# Altium PCB PCB1.PcbDoc
Units mm, origin at the board's own origin, x right, y up, seen from the top; angles counter-clockwise.
Board outline 65.02 x 29.97 mm, 2 copper layers (Top Layer, Bottom Layer); 37 components, 27 nets, 109 pads, 23 vias.
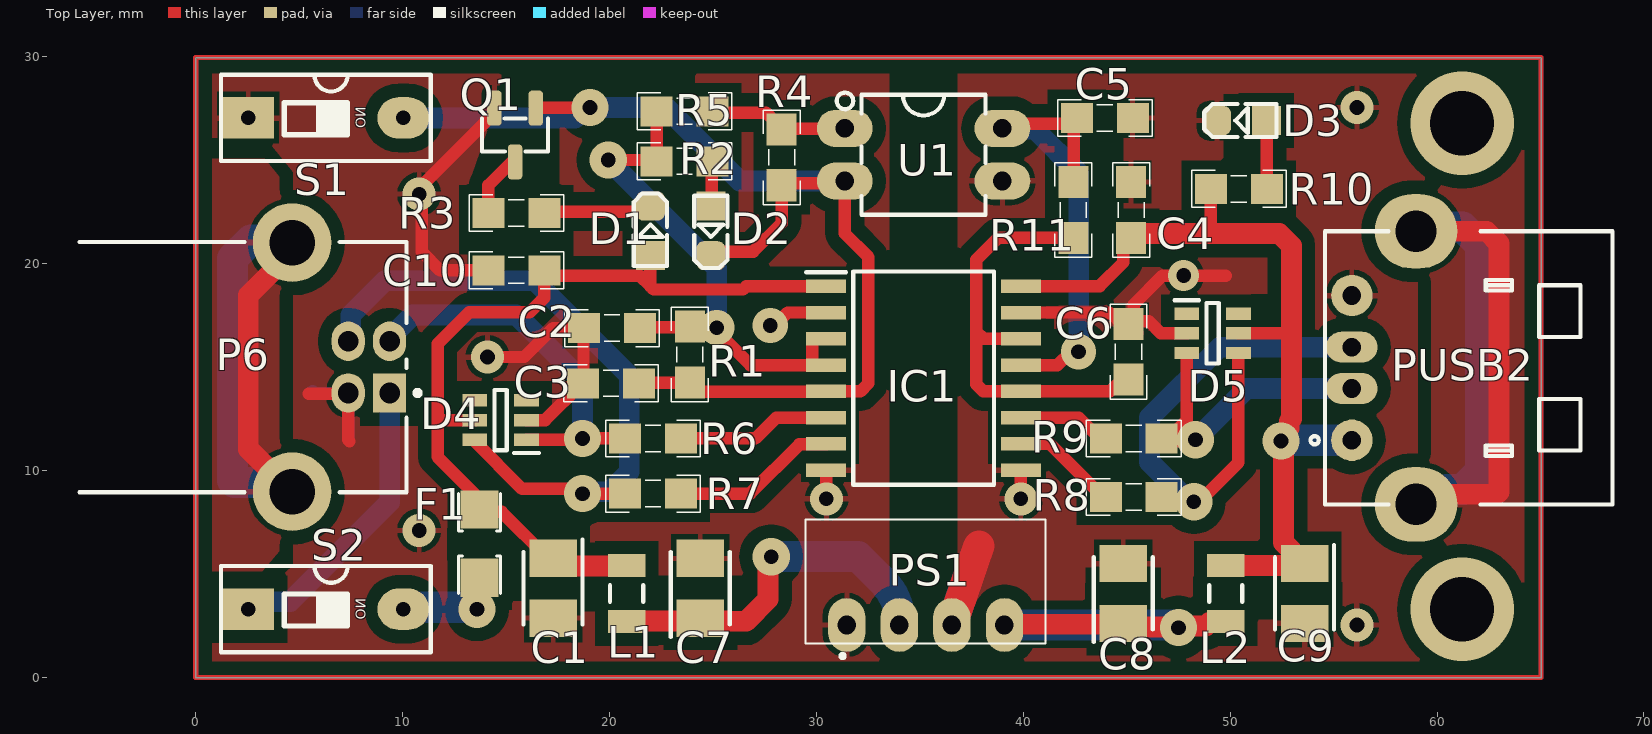
[diagram p0: Top Layer view]
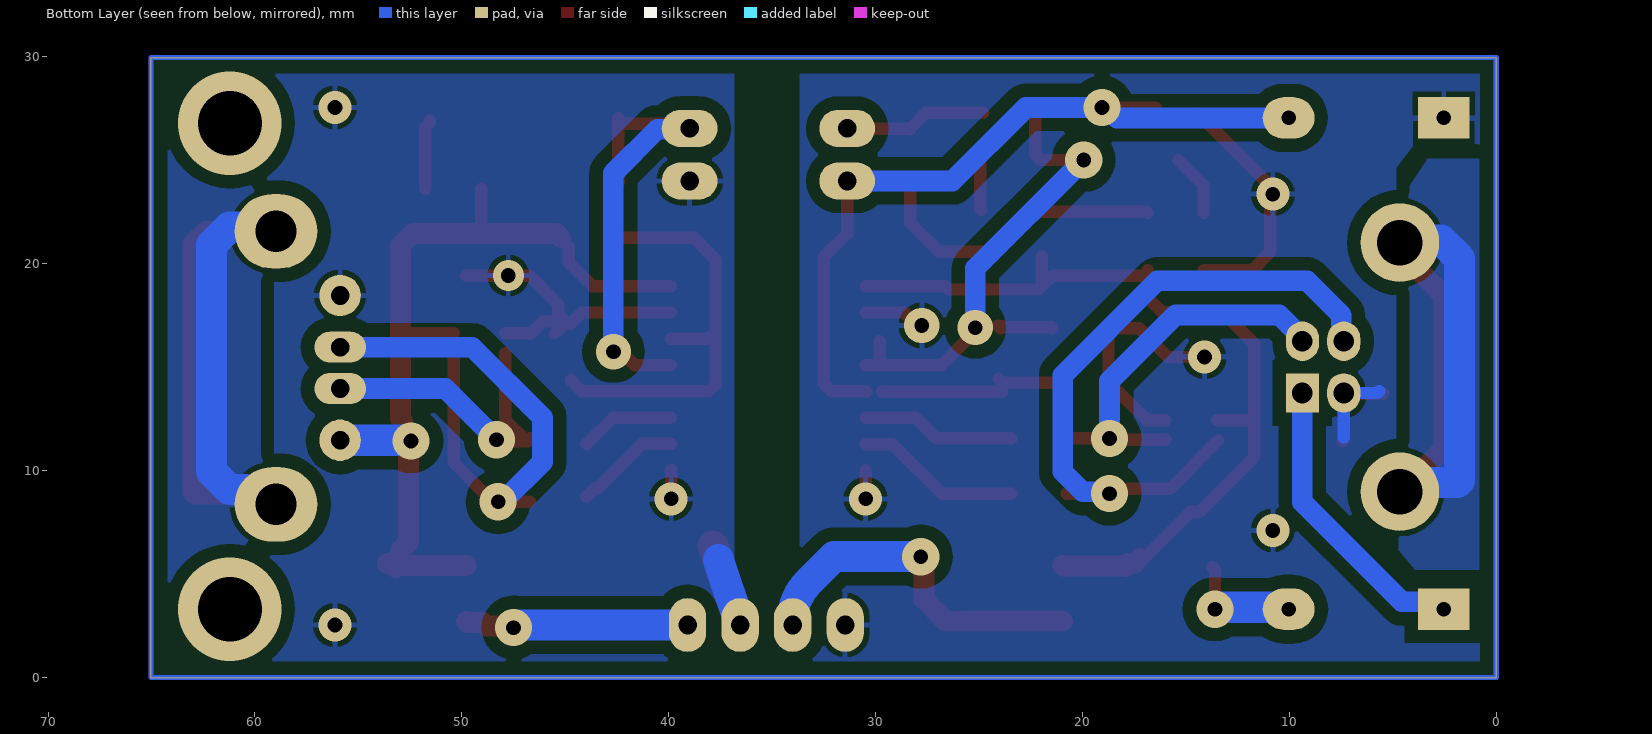
[diagram p1: Bottom Layer view, seen from below]
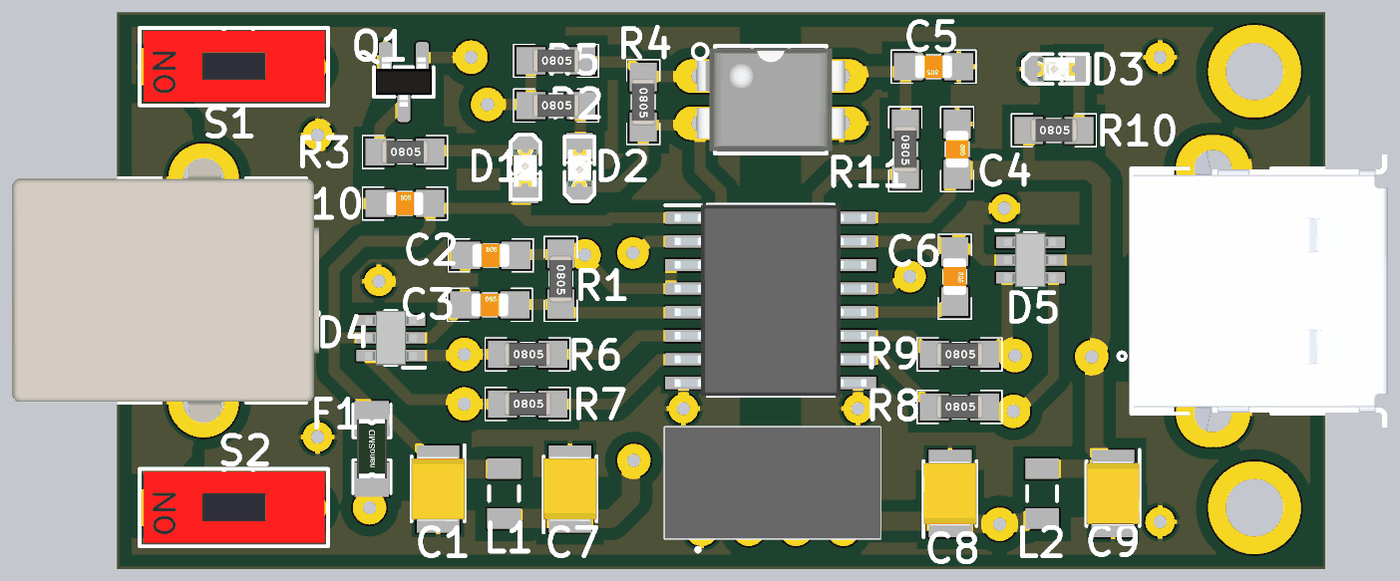
[diagram p2: 3D render of the assembled board from above, using the file's embedded part models]

## Layer stack, top to bottom
Top Solder: solder mask 0.0102, Solder Resist, Dk 3.5
Top Layer: signal copper 0.0356
Dielectric 1: dielectric 0.32, FR-4, Dk 4.8
Bottom Layer: signal copper 0.0356
Bottom Solder: solder mask 0.0102, Solder Resist, Dk 3.5

## Board outline
0,0 0,29.972 65.024,29.972 65.024,0

## Design rules (kind name [scope] priority, off if disabled: settings)
Clearance 0.66 [InNamedPolygon('GND1top') Or InNamedPolygon('GND2top') Or InNamedPolygon('SHI1top') Or InNamedPolygon('SHI2top')] p1: gap=0.65 ignorepadtopadclearanceinfootprint=FALSE except(0: Arc-Hole Track-Hole SMDPad-Hole THPad-Hole Via-Hole Fill-Hole Poly-Hole Region-Hole Text-Hole)
Clearance "Top poly clearance sid" [InNamedPolygon('GND1top') Or InNamedPolygon('GND2top') Or InNamedPolygon('SHI1top') Or InNamedPolygon('SHI2top')] p2: gap=0.7 ignorepadtopadclearanceinfootprint=FALSE except(0: Arc-Hole Track-Hole SMDPad-Hole THPad-Hole Via-Hole Fill-Hole Poly-Hole Region-Hole Text-Hole)
Clearance "bottom clearance sid" [InNamedPolygon('GND1') Or InNamedPolygon('GND2') Or InNamedPolygon('SHI1') Or InNamedPolygon('SHI2')] p3: gap=0.65 ignorepadtopadclearanceinfootprint=FALSE except(0: Arc-Hole Track-Hole SMDPad-Hole THPad-Hole Via-Hole Fill-Hole Poly-Hole Region-Hole Text-Hole)
Clearance Clearance_3 [InNamedPolygon('SHI2top')] p4: gap=0.65 ignorepadtopadclearanceinfootprint=FALSE except(0: Arc-Hole Track-Hole SMDPad-Hole THPad-Hole Via-Hole Fill-Hole Poly-Hole Region-Hole Text-Hole)
Clearance Clearance_2 [InNamedPolygon('GND2TOP')] p5: gap=0.65 ignorepadtopadclearanceinfootprint=FALSE except(0: Arc-Hole Track-Hole SMDPad-Hole THPad-Hole Via-Hole Fill-Hole Poly-Hole Region-Hole Text-Hole)
Clearance Clearance_1 [InNamedPolygon('GND1top') Or InNamedPolygon('GND1top')] p6: gap=0.65 ignorepadtopadclearanceinfootprint=FALSE except(0: Arc-Hole Track-Hole SMDPad-Hole THPad-Hole Via-Hole Fill-Hole Poly-Hole Region-Hole Text-Hole)
Clearance [All] p7: gap=0.254 ignorepadtopadclearanceinfootprint=FALSE except(0: Arc-Hole Track-Hole SMDPad-Hole THPad-Hole Via-Hole Fill-Hole Poly-Hole Region-Hole Text-Hole)
PolygonConnect [All] p1: connectstyle=Relief reliefconductorwidth=0.254 reliefentries=4 polygonreliefangle="90 Angle" airgapwidth=0.254
RoutingVias [All] p1: holewidth=0.711 width=1.27 viastyle="Through Hole" minholewidth=0.711 minwidth=1.27 maxholewidth=0.711 maxwidth=1.27
SolderMaskExpansion [All] p1: expansion=0.102 istentingtop=FALSE
Width [All] p1: maxlimit=1.5 minlimit=0.6 preferedwidth=1
30 further rules are at their usual default settings.

## Components (designator, comment, footprint, x,y, rotation, side; value= is the part's Value field where it differs from the comment)
C1 "TAJB106K016RNJ" CAPPM3528X210N 17.272,4.318 r270 top
C2 "0.1uF" CAPC3413X12N 20.113,16.891 r0 top
C3 "0.1uF" CAPC3413X12N 20.066,14.224 r0 top
C4 "0.1uF" CAPC3413X12N 45.212,22.606 r270 top
C5 "0.1uF" CAPC3413X12N 43.942,27.051 r180 top
C6 "0.1uF" CAPC3413X12N 45.085,15.748 r270 top
C7 "TAJB106K016RNJ" CAPPM3528X210N 24.384,4.318 r90 top
C8 "TAJB106K016RNJ" CAPPM3528X210N 44.831,4.064 r90 top
C9 "TAJB106K016RNJ" CAPPM3528X210N 53.594,4.064 r270 top
C10 "0.1uF" CAPC3413X12N 15.494,19.685 r0 top
D1 "LED805BLU" LED0805BLU 21.971,21.59 r90 top
D2 "LED805RED" LED0805RED 24.892,21.59 r270 top
D3 "LED805RED" LED0805RED 50.546,26.924 r180 top
D4 "CDSOT23-SRV05-4" SOT95P280X145-6N 14.732,12.446 r180 top
D5 "CDSOT23-SRV05-4" SOT95P280X145-6N 49.149,16.637 r0 top
F1 "F=1.0 A" "1206 FUSE" 13.716,6.477 r90 top
IC1 "ADUM3160BRWZ" SOIC127P1032X265-16N 35.179,14.469 r0 top
L1 "Inductor" INDC3216 20.828,4.064 r270 top value=10mH
L2 "Inductor" INDC3216 49.784,4.064 r90 top value=10mH
P6 "USB Connector" USB2.5-2H4F 9.366,13.756 r180 top
PS1 "B0505S-1W" B0505S1W 31.464,2.54 r0 top
PUSB2 "CONN_USB_A" USB_A_REC_RA_THD 55.88,14.97 r270 top
Q1 "MMUN2234LT1G" SOT23_3 15.43,26.226 r270 top
R1 "1K" RESC3413X04N 23.876,15.621 r270 top
R2 "1K" RESC3413X04N 23.622,24.956 r0 top
R3 "1K" RESC3413X04N 15.494,22.454 r0 top
R4 "10K" RESC3413X04N 28.321,25.146 r270 top
R5 "330R" RESC3413X04N 23.622,27.368 r0 top
R6 "24R" RESC3413X04N 22.098,11.557 r0 top
R7 "24R" RESC3413X04N 22.098,8.89 r0 top
R8 "24R" RESC3413X04N 45.339,8.732 r0 top
R9 "24R" RESC3413X04N 45.339,11.557 r0 top
R10 "1K" RESC3413X04N 50.419,23.622 r0 top
R11 "1K" RESC3413X04N 42.418,22.606 r270 top
S1 "DS1" "DIP Switch x1" 2.533,27.051 r270 top
S2 "DS1" "DIP Switch x1" 2.533,3.302 r270 top
U1 "EL817" DIP_4 35.179,25.273 r0 top

## Footprints (in the part's own frame and the unit in brackets; to place one, negate y for a bottom-side part, rotate by r counter-clockwise, add the part's x,y. Pads: shape width x height; smd on the part's side, far side on the other; paste and mask are expansions set on the pad)
"1206 FUSE" [mm] "Fast Acting Smd 1206 non-Resettable Fuse Chip For Pcb Board-Design:Abbas Basereh"
  rect 1.85x1.85 smd: 1(-1.65,0) 2(1.65,0)
  silkscreen extent -2.41,-1.02 2.41,1.02, body extent -1.6,-0.8 1.6,0.8, height 1
B0505S1W [mm]
  oval 1.8x2.6 hole 0.9: 1(0,0) 2(2.54,0) 3(5.08,0) 4(7.62,0)
  silkscreen extent -1.99,-1.6 9.61,5.1, body extent -1.99,-0.9 9.61,5.1, height 10.51
CAPC3413X12N [mm] "Chip Capacitor, 2-Leads, Body 3/40x1/30mm, IPC Medium Density-Design:Abbas Basereh"
  rect 1.55x1.45 smd: 1(-1.35,0) 2(1.35,0)
  silkscreen extent -2.29,-0.89 2.29,0.89, body extent -1,-0.62 1,0.63, height 0.78
CAPPM3528X210N [mm]
  rect 1.8x2.3 smd: 1(-1.45,0) 2(1.45,0)
  silkscreen extent -2.35,-1.43 1.75,1.43, body extent -1.75,-1.43 1.75,1.43, height 2.1
"DIP Switch x1" [mm] "Switch DIP 1 way flat slide Thru-Hole-Design:Ali Hafizi"
  rect 2x2.5 hole 0.7: 1(0,0)
  oval 2x2.5 hole 0.7: 2(0,7.5)
  silkscreen extent -2.09,-1.32 2.08,8.82, body extent -1.94,-1.11 1.89,8.64, height 7.33
DIP_4 [mm] "BRIDGE DIODE, DIP, pitch 2.54mm, 300mil Width"
  oval 2.7x1.8 hole 0.9: 1(-3.81,1.27) 2(-3.81,-1.27) 3(3.81,-1.27) 4(3.81,1.27)
  silkscreen extent -4.2,-2.9 3,3, body extent -4,-2.77 4,2.77, height 4.31
INDC3216 [mm] "Chip Inductor, Body 3.2x1.6mm, IPC High Density"
  rect 1.1x1.8 smd: 1(-1.35,0) 2(1.35,0)
  silkscreen extent -0.4,-0.8 0.4,0.8, body extent -1.7,-0.9 1.7,0.9, height 0.55
LED0805BLU [mm] "LED SMD 0805, BLUE"
  rect 1.4x1.4 smd mask+0.075: 1(-1.2,0)
  rrect50% 1.4x1.4 smd mask+0.075: 2(1.2,0)
  Top Layer pour cut-out: -0.5,0.8 0.5,0.8 0.5,-0.8 -0.5,-0.8
  silkscreen extent -1.7,-0.8 1.8,0.8, body extent -1,-0.63 1,0.63, height 0.7
LED0805RED [mm] "LED SMD 0805, RED"
  rect 1.4x1.4 smd mask+0.075: 1(-1.2,0)
  rrect50% 1.4x1.4 smd mask+0.075: 2(1.2,0)
  Top Layer pour cut-out: -0.5,0.8 0.5,0.8 0.5,-0.8 -0.5,-0.8
  silkscreen extent -1.7,-0.8 1.8,0.8, body extent -1,-0.63 1,0.63, height 0.7
RESC3413X04N [mm] "Chip Resistor, 2-Leads, Body 3/40x1/30mm, IPC Medium Density-Design:Abbas Basereh"
  rect 1.55x1.45 smd: 1(-1.35,0) 2(1.35,0)
  silkscreen extent -2.29,-0.89 2.29,0.89, body extent -1.25,-0.62 1.25,0.62, height 0.79
SOIC127P1032X265-16N [mm]
  rect 1.925x0.65 smd: 1(-4.712,4.445) 2(-4.712,3.175) 3(-4.712,1.905) 4(-4.712,0.635) 5(-4.712,-0.635) 6(-4.712,-1.905) 7(-4.712,-3.175) 8(-4.712,-4.445) 9(4.712,-4.445) 10(4.712,-3.175) 11(4.712,-1.905) 12(4.712,-0.635) 13(4.712,0.635) 14(4.712,1.905) 15(4.712,3.175) 16(4.712,4.445)
  silkscreen extent -5.68,-5.15 3.4,5.15, body extent -5.16,-5.15 5.16,5.15, height 2.65
SOT23_3 [mm] "SOT-23, Micro3, MO-178, TO-236AB, MO-193C, SuperSOT3, SC-59, 1.9mm pitch 3X1.5mm body"
  rrect50% 1.7x0.7 smd: 1(-1.3,1) 2(-1.3,-1) 3(1.3,0)
  silkscreen extent -0.8,-1.6 0.8,1.6, body extent -1.32,-1.5 1.32,1.5, height 1.08
SOT95P280X145-6N [mm]
  rect 1.2x0.6 smd: 1(-1.25,0.95) 2(-1.25,0) 3(-1.25,-0.95) 4(1.25,-0.95) 5(1.25,0) 6(1.25,0.95)
  silkscreen extent -1.85,-1.46 0.3,1.6, body extent -1.4,-1.46 1.4,1.46, height 0.78
USB2.5-2H4F [mm] "Connector; USB1.1, Type B, Thru-Hole; 4 Position; Right Angle"
  rect 1.6x1.9 hole 1: 1(0,0)
  oval 1.6x1.9 hole 1: 2(0,-2.5) 3(2,-2.5) 4(2,0)
  round 3.8 hole 2.2: 5(4.71,-7.27) 6(4.71,4.77)
  silkscreen extent -1.48,-7.3 14.99,4.8, body extent -1.5,-8.7 15,6.2, height 10.95
USB_A_REC_RA_THD [mm] "CONN, USB A, Receptacle, RIGHT ANGLE, THD"
  round 2 hole 0.9: 1(3.5,0) 4(-3.5,0)
  oval 1.5x2.5 hole 0.9: 2(1,0) 3(-1,0)
  oval 3.6x4 hole 2: SH1(-6.6,3.1) SH2(6.6,3.1)
  silkscreen extent -6.6,-2 6.6,12.6, body extent -7.9,-1.2 7.9,12.5, height 6.95

## Part data
C1 C7 C8 C9: "Capacitor Polarised", Manufacturer_Name=AVX, Mouser Part Number=581-TAJB106K016, Arrow Part Number=TAJB106K016RNJ, Arrow Price/Stock=https://www.arrow.com/en/products/tajb106k016rnj/avx, Datasheet Link=http://datasheets.avx.com/TAJ.pdf, Height=2.1mm, Manufacturer_Part_Number=TAJB106K016RNJ, Mouser Price/Stock=https://www.mouser.co.uk/ProductDetail/AVX/TAJB106K016RNJ?qs=wgedUHV26DXzpWCLxWDqDw%3D%3D
C2 C3 C4 C5 C6 C10: library part "CAP SMD 0805", "CAP 0805", Data=16-12-2016, Desc.="CAP SMD 0805", Designer="Abbas Basereh"
D1: library part LED_SMD_0805_BLU, "LED, SMD, 0805, BLUE", ASSEMBLY=ASSEMBLY, DESC=DESCRIPTION, MANF=MANF, MANF_P#=MANF_PART#, PARAM2=2.2V, PRICE=36t@Javan
D2 D3: library part LED_SMD_0805_RED, "LED, SMD, 0805, RED", ASSEMBLY=ASSEMBLY, DESC=DESCRIPTION, MANF=MANF, MANF_P#=MANF_PART#, PARAM2=2.2V, PRICE=36t@Javan
D4 D5: "TVS Diode (Uni-directional)", Manufacturer_Name=Bourns, Mouser Part Number=652-CDSOT23-SRV05-4, Arrow Part Number=CDSOT23-SRV05-4, Arrow Price/Stock=https://www.arrow.com/en/products/cdsot23-srv05-4/bourns, Datasheet Link=https://www.bourns.com/docs/Product-Datasheets/CDSOT23-SRV05-4.pdf, Height=1.45mm, Manufacturer_Part_Number=CDSOT23-SRV05-4, Mouser Price/Stock=https://www.mouser.co.uk/ProductDetail/Bourns/CDSOT23-SRV05-4/?qs=y169g2bsK9oS5rHKLe0eWA%3D%3D
F1: library part "Fuse SMD1206", "SMD Fuses 1206", Data=16-12-2016, Desc.="SMD Fuses 1206", Designer="Abbas Basereh"
IC1: "Integrated Circuit", Manufacturer_Name="Analog Devices", Mouser Part Number=584-ADUM3160BRWZ, Arrow Part Number=ADUM3160BRWZ, Arrow Price/Stock=https://www.arrow.com/en/products/adum3160brwz/analog-devices, Datasheet Link=http://www.analog.com/media/en/technical-documentation/data-sheets/ADuM3160.pdf, Height=2.65mm, Manufacturer_Part_Number=ADUM3160BRWZ, Mouser Price/Stock=https://www.mouser.co.uk/ProductDetail/Analog-Devices/ADUM3160BRWZ/?qs=WIvQP4zGanjmPiCfFUKkZQ%3D%3D
P6: library part "USB B-Type", "USB Connector-B Type", Adding Date=10/26/2010
PS1: "Power Supply", Manufacturer_Name=Mornsun, Datasheet Link=https://www.mornsun-power.com/uploads/pdf/B_D-1W.pdf, Height=10.41mm, Manufacturer_Part_Number=B0505S-1W
PUSB2: library part CONN_USB_A_REC_RA_THD, "CONN, USB, A, RECEPTACLE, R/A, THD"
Q1: "Transistor BJT NPN", Manufacturer_Name="ON Semiconductor", Mouser Part Number=863-MMUN2234LT1G, Arrow Part Number=MMUN2234LT1G, Arrow Price/Stock=https://www.arrow.com/en/products/mmun2234lt1g/on-semiconductor, Datasheet Link=http://www.onsemi.com/pub/Collateral/DTC124X-D.PDF, Height=1.11mm, Manufacturer_Part_Number=MMUN2234LT1G, Mouser Price/Stock=https://www.mouser.com/Search/Refine.aspx?Keyword=863-MMUN2234LT1G
R1 R2 R3 R4 R5 R6 R7 R8 R9 R10 R11: library part "RES 0805 0.125W", "RES 0805", Data=16-12-2016, Desc.="RES SMD 0805", Designer="Abbas Basereh"
S1 S2: library part "DIP Switch 1", "1 BIT DIP Switch"
U1: library part OPTC_TR4P_EL817, "OPTOCOUPLER, TRANSISTOR, 4PIN", PARAM=IF=5mA, PARAM2="VCE = 5V", PRICE=300t@Paya
L1 L2: Code_IEC=1005, Code_JEITA=0402, LatestRevisionDate=29-May-2009, LatestRevisionNote="IPC-7351 Footprint Added.", PackageDescription="Chip Inductor", PackageReference=0402-A, Published=8-Jun-2000, Publisher="Altium Limited"

## Via types
v1: diameter 1.8, hole 0.711, Top Layer to Bottom Layer, 10 vias
v2: diameter 1.6, hole 0.711, Top Layer to Bottom Layer, 7 vias
v3: diameter 1.7, hole 0.711, Top Layer to Bottom Layer, 3 vias
v4: diameter 5, hole 3.1, Top Layer to Bottom Layer, 2 vias
v5: diameter 1.5, hole 0.711, Top Layer to Bottom Layer, 1 vias

## Nets (pads, with @x,y where several pads share a name; then routed paths per layer and width w, separated by ;. In a path a pad name is that pad's centre, name@x,y a point inside that pad or via, vN(x,y) a via of type N, cw(c..) or ccw(c..) an arc to the next point about the centre after c; other vN are vias at no path point)
D1m: D4.1 P6.2 R6.1 | length 18.8
  Top Layer w0.6: D4.1 18.627,11.496 v1(18.688,11.557) R6.1
  Bottom Layer w1: P6.2 9.366,16.406 10.486,17.526 15.494,17.526 18.688,14.332 v1(18.688,11.557)
D1p: D4.6 P6.3 R7.1 | length 33.1
  Top Layer w0.6: D4.6@13.439,11.453 15.772,9.12 18.458,9.12 v1(18.688,8.89) R7.1
  Bottom Layer w1: P6.3 7.481,16.371 7.481,17.514 9.144,19.177 16.383,19.177 20.955,14.605 20.955,9.951 19.988,8.984 18.782,8.984 v1(18.688,8.89)
D2m: D5.3 PUSB2.2 R9.2 | length 15
  Top Layer w0.6: R9.2 46.816,11.43 R9.2@46.866,11.43 ; D5.3 47.899,12.463 R9.2@46.866,11.43 ; v1(48.323,11.493) 48.26,11.43 R9.2@46.866,11.43
  Bottom Layer w1: v1(48.323,11.493) 50.8,13.97 PUSB2.2
D2p: D5.4 PUSB2.3 R8.2 | length 26.1
  Top Layer w0.6: R8.2@46.704,8.494 48.499,8.494 50.399,10.394 D5.4
  Bottom Layer w1: v1(48.245,8.494) 48.028,8.494 46.101,10.421 46.101,12.573 49.498,15.97 PUSB2.3
DDm: IC1.11 R9.1 | length 4.6
  Top Layer w0.6: IC1.11 42.678,12.564 43.939,11.303 R9.1@43.989,11.303
DDp: IC1.10 R8.1 | length 5.2
  Top Layer w0.6: IC1.10 41.284,11.294 43.421,9.157 43.564,9.157 R8.1
GND1: C1.2 C2.1 C3.1 C7.2 C10.1 D4.2 IC1.2 IC1.8 P6.4 PS1.1 Q1.2 S1.1 | length 35.8
  Top Layer w0.6: 5.461,13.716 7.326,13.716 P6.4 7.366,11.493 7.429,11.43 ; v2(14.097,15.494) 15.875,15.494 17.272,16.891 C2.1 18.74,16.867 18.74,14.248 C3.1 ; C10.1 11.811,19.685 10.922,20.574 10.922,23.241 v2(10.795,23.368) 10.986,23.559 10.986,23.831 Q1.2@14.414,27.259 ; D4.2 16.888,12.446 18.589,14.147 C3.1@18.589,14.351 ; v3(27.769,17.018) 27.978,17.018 28.605,17.644 IC1.2 ; IC1.8 30.48,10.011 v2(30.48,8.636)
  Bottom Layer w0.6: 5.651,13.843 5.739,13.756 P6.4 7.366,11.62
  other v2: 10.795,7.112
GND2: C4.1 C5.1 C6.1 C8.2 C9.2 D3.2 D5.2 IC1.9 IC1.15 PS1.3 PUSB2.4 U1.3 | length 23.5
  Top Layer w0.6: v2(39.878,8.636) 39.878,10.011 IC1.9 ; IC1.15 44.158,17.644 44.229,17.573 44.279,17.573 44.754,17.098 C6.1 ; C6.1@45.253,16.93 45.253,16.894 C6.1@45.51,16.637 ; D5.2 46.652,16.637 46.064,17.225 45.176,17.225 45.084,17.318 45.339,17.573 45.339,18.034 46.736,19.431 v5(47.752,19.431) 49.784,19.431
  Top Layer w1.5: PS1.3 37.846,6.35
  Bottom Layer w1.5: PS1.3 37.592,5.715
  other v2: 56.134,2.54 56.134,27.559
NetC7_1: C7.1 L1.2 PS1.2 | length 22.2
  Top Layer w1: 25.654,2.739 20.98,2.739 20.955,2.714 26.59,2.714 27.66,3.784 27.66,5.689 v1(27.813,5.842)
  Bottom Layer w1.5: v1(27.813,5.842) 32.004,5.842 33.26,4.586 cw(c31.464,2.79) 33.947,3.327 cw(c31.464,2.79) 34.004,2.79 PS1.2
NetC8_1: C8.1 L2.1 PS1.4 | length 19.3
  Top Layer w1: PS1.4 39.121,2.577 44.794,2.577 44.932,2.439 47.218,2.439 v1@47.404,2.253 ; v1(47.498,2.413) 47.574,2.489 48.816,2.489 48.991,2.664 49.734,2.664 L2.1
  Bottom Layer w1.5: PS1.4 47.29,2.54 47.417,2.413 v1(47.498,2.413)
NetD1_2: D1.2 R3.2 | length 5.2
  Top Layer w0.6: R3.2 16.912,22.522 21.903,22.522 D1.2@21.971,22.59
NetD2_1: D2.1 R2.2 | length 2.7
  Top Layer w0.6: D2.1@24.892,22.59 24.932,22.63 24.932,25.233 R2.2@24.972,25.273
NetD3_1: D3.1 R10.2 | length 3.4
  Top Layer w0.6: D3.1@51.546,26.924 51.546,26.824 51.769,26.601 R10.2
NetF1_1: F1.1 S2.2 | length 5.7
  Top Layer w0.6: v1(13.589,3.302) 13.589,5.208 F1.1@13.716,5.335
  Bottom Layer w1.5: S2.2 10.129,3.398 13.493,3.398 v1(13.589,3.302)
NetQ1_3: Q1.3 R3.1 | length 3.1
  Top Layer w0.6: R3.1 14.144,23.796 Q1.3@15.352,25.004
NetR4_1: R4.1 R5.2 U1.1 | length 7
  Top Layer w0.6: R5.2@24.799,27.305 27.562,27.305 28.321,26.546 R4.1 28.345,26.519 31.345,26.519 U1.1
shi1: P6.5 P6.6 | length 31
  Top Layer w1: P6.5@4.58,21.026 P6.5 4.656,20.595 2.54,18.479 2.54,11.049 4.603,8.986 P6.6
  Bottom Layer w1.5: P6.6 4.413,8.986 3.972,9.426 1.867,9.426 1.778,9.515 1.778,20.267 2.657,21.145 4.537,21.145 P6.5
shi2: PUSB2.SH1 PUSB2.SH2 | length 36.8
  Top Layer w1: PUSB2.SH2@59.98,8.37 60.477,8.867 62.892,8.867 62.992,8.968 62.992,20.984 62.406,21.57 PUSB2.SH1@59.98,21.57
  Bottom Layer w1.5: PUSB2.SH2 59.748,8.37 60.459,9.08 61.224,9.08 62.103,9.959 62.103,20.902 61.224,21.78 59.19,21.78 PUSB2.SH1
SPD: C5.2 IC1.13 R11.1 U1.4 | length 23
  Top Layer w0.6: U1.4 39.219,26.773 42.187,26.773 42.442,27.027 42.442,23.979 R11.1 ; IC1.13 41.647,15.104 42.291,15.748 v3(42.672,15.748)
  Bottom Layer w1: U1.4 39.024,26.508 40.548,26.508 42.672,24.384 v3(42.672,15.748)
SPU: C3.2 D2.2 IC1.5 Q1.1 R1.2 R4.2 S1.2 U1.2 | length 54.7
  Top Layer w0.6: Q1.1 16.447,27.542 19.033,27.542 v1(19.05,27.559) ; C3.2 21.439,14.248 23.852,14.248 R1.2 R1.2@24.049,14.444 ; R1.2@23.876,13.809 IC1.5@29.68,13.809 ; D2.2@24.892,20.59 26.94,20.59 28.321,21.971 R4.2 28.424,23.9 31.266,23.9 U1.2 31.369,21.463 32.512,20.32 32.512,14.224 32.122,13.834 IC1.5 IC1.5@30.442,13.809
  Bottom Layer w1: S1.2 v1@18.326,27.051 ; v1(19.05,27.559) 22.733,27.559 26.289,24.003 U1.2
UDm: IC1.6 R6.2 | length 7.4
  Top Layer w0.6: R6.2 27.051,11.557 28.058,12.564 IC1.6
UDp: IC1.7 R7.2 | length 8
  Top Layer w0.6: R7.2 26.797,8.89 29.176,11.269 30.442,11.269 IC1.7
VBUS1: P6.1 S2.1 | length 14.3
  Bottom Layer w1: S2.1 2.89,3.659 4.548,3.659 6.167,5.278 9.366,8.477 P6.1
VBUS1F: C1.1 C10.2 D1.1 D4.5 F1.2 IC1.1 L1.1 | length 41.6
  Top Layer w0.6: D4.5 11.811,12.446 11.684,12.573 ; C10.2 C10.2@16.844,19.431 ; C1.1 17.249,5.768 17.022,5.768 14.78,8.01 14.341,8.01 11.684,10.667 11.684,12.573 ; D1.1@21.971,20.34 21.971,18.914 ; IC1.1 26.606,18.914 26.448,18.756 22.129,18.756 21.971,18.914 ; 11.684,12.573 11.684,16.129 13.208,17.653 16.129,17.653 16.844,18.368 C10.2@16.844,19.431 ; C10.2@16.844,19.431 21.454,19.431 21.971,18.914
  Top Layer w1: C1.1@17.249,5.768 17.507,5.51 17.807,5.51 17.907,5.41 17.907,5.364 17.932,5.389 20.93,5.389 L1.1@20.955,5.414
VBUS2: C4.2 C9.1 D5.5 IC1.16 L2.2 PUSB2.1 R10.1 | length 42.5
  Top Layer w0.6: IC1.16 41.647,18.914 41.656,18.923 43.688,18.923 44.83,20.065 C4.2@44.83,20.824 ; 49.069,21.256 R10.1 ; D5.5 52.959,16.637
  Top Layer w1: C4.2 45.419,21.463 52.373,21.463 52.959,20.877 52.959,16.637 52.959,12.504 52.851,12.396 52.851,12.046 52.451,11.646 v1(52.451,11.43) ; L2.2 52.944,5.414 53.113,5.414 53.213,5.314 C9.1@53.213,5.645 ; v1@52.578,11.43 52.578,6.53 52.944,6.164 52.944,5.914 C9.1@53.213,5.645 ; C9.1 53.344,5.514 C9.1@53.213,5.645
  Bottom Layer w1.5: v1@52.451,11.47 PUSB2.1
VDD1: C2.2 IC1.3 IC1.4 R1.1 R2.1 R5.1 | length 25.1
  Top Layer w0.6: v1(19.939,25.019) 22.018,25.019 22.272,25.273 R5.1 ; C2.2 21.503,16.931 23.836,16.931 R1.1 23.956,16.891 R1.1@24.083,17.018 ; v3@24.892,17.018 26.806,15.104 IC1.4@29.83,15.104 ; IC1.3@29.804,16.256 29.804,15.129 IC1.4@29.83,15.104 ; IC1.4 IC1.4@29.83,15.104
  Bottom Layer w1: v1(19.939,25.019) 25.178,19.78 v3(25.178,16.915)
VDD2: C6.2 IC1.12 IC1.14 R11.2 | length 20.9
  Top Layer w0.6: IC1.14 39.882,16.383 38.07,16.383 37.719,16.734 ; R11.2 38.782,21.256 37.719,20.193 37.719,16.734 ; C6.2@44.704,14.398 44.704,14.348 44.19,13.834 IC1.12 38.07,13.834 37.719,14.186 37.719,16.734
pads on no net: D4.3 D4.4 D5.1 D5.6
copper on no net:
  other v4: 61.214,3.302 61.214,26.797

## Polygon pours and split planes (outlines as drawn)
GND2 on Bottom Layer "GND2" (solid, pour order 1): 36.83,0.127 36.83,29.845 64.897,29.845 61.658,26.226 59.055,23.622 59.055,6.664 64.897,0.127
GND1 on Bottom Layer "GND1" (solid, pour order 0): 33.655,30.119 0.124,29.845 0.124,25.781 3.937,25.781 4.826,24.652 4.826,4.318 0.232,4.318 0.232,0.403 33.655,0.403
shi1 on Bottom Layer "SHI1" (solid, pour order 4): 4.699,21.082 4.699,22.987 3.345,24.998 3.345,25.075 0.805,25.075 0.805,5.207 3.906,5.207 4.699,6.141
shi2 on Bottom Layer "SHI2" (solid, pour order 5): 59.055,8.491 61.679,4.593 64.219,1.143 64.219,4.516 64.219,28.531 59.055,22.448
GND1 on Top Layer "GND1top" (solid, pour order 6): 33.528,29.865 0.105,29.865 0.105,26.098 3.36,26.098 4.699,24.428 4.699,5.433 3.238,4.064 0.105,4.064 0.105,0.149 33.528,0.149
GND2 on Top Layer "GND2top" (solid, pour order 7): 36.83,0.127 36.83,29.845 64.897,29.845 61.658,26.226 59.055,23.622 59.055,6.664 64.897,0.127
shi1 on Top Layer "SHI1top" (solid, pour order 8): 4.572,23.546 3.474,25.082 0.678,25.082 0.678,5.136 3.218,5.136 4.572,6.731
shi2 on Top Layer "SHI2top" (solid, pour order 9): 59.055,8.491 61.679,4.593 64.219,1.143 64.219,4.516 64.219,28.531 59.055,22.448

## Other copper
Top Layer:
  pour cut-out: 46.101,20.352 47.371,20.352 47.371,19.725 46.774,19.725 46.587,19.831
  pour cut-out: 19.431,17.907 20.701,17.907 20.701,12.932 17.093,12.236 18.383,13.525 19.431,13.525
  pour cut-out: 43.497,28.418 44.864,28.418 44.864,22.545 43.497,22.54
  pour cut-out: 51.054,25.019 49.673,25.019 49.673,28.224 51.054,28.224
  pour cut-out: 13.113,20.447 13.113,21.717 15.176,21.717 15.176,20.447
  pour cut-out: 12.763,21.717 12.7,21.653 12.7,20.447 13.115,20.447 13.113,20.449 13.113,21.717
  pour cut-out: 14.795,7.239 12.128,7.239 12.128,5.651 14.795,5.651
  pour cut-out: 18.676,3.175 18.676,4.953 21.971,4.953 21.971,3.175
  pour cut-out: 46.677,5.334 42.989,5.334 42.981,3.787 46.667,3.787
  pour cut-out: 46.609,16.765 44.26,16.765 44.259,15.684 46.609,15.684
  pour cut-out: 50.99,18.542 52.514,18.542 52.514,17.081 52.451,17.018 52.387,17.081 50.99,17.081
  pour cut-out: 55.435,4.635 51.371,4.635 51.371,2.794 55.435,2.794
  pour cut-out: 56.007,10.096 53.086,10.096 53.023,10.16 53.023,13.271 55.944,13.271 56.007,13.335
  pour cut-out: 22.162,3.683 22.162,4.953 26.45,4.953 26.45,3.683
  pour cut-out: 15.341,3.683 15.341,4.953 18.669,4.953 18.669,3.683
  pour cut-out: 26.162,23.939 20.637,23.939 20.637,19.875 26.162,19.875
  pour cut-out: 48.197,4.889 51.371,4.889 51.371,3.238 48.197,3.238
  pour cut-out: 24.13,29.21 24.108,29.188 19.456,29.188 19.456,26.314 19.494,26.352 24.194,26.352
  pour cut-out: 14.773,29.146 14.773,26.826 14.088,26.446 13.19,23.876 15.621,23.876 17.59,23.876 17.59,29.146
Multi-Layer:
  the board outline again, w0.254

## Text inside footprints (layer, text, board x,y; h text height)
P6: Mechanical 1 "PCB Edge" at -5.319,20.657 h0.25 r270
S1: Top Overlay "ON" at 7.733,26.551 h0.5 r270
S2: Top Overlay "ON" at 7.733,2.802 h0.5 r270